# Altium PCB AD8318.PcbDoc
Units mil, origin at the board's own origin, x right, y up, seen from the top; angles counter-clockwise.
Board outline 2076 x 2487 mil, 2 copper layers (Top Layer, Bottom Layer); 32 components, 16 nets, 111 pads, 382 vias.
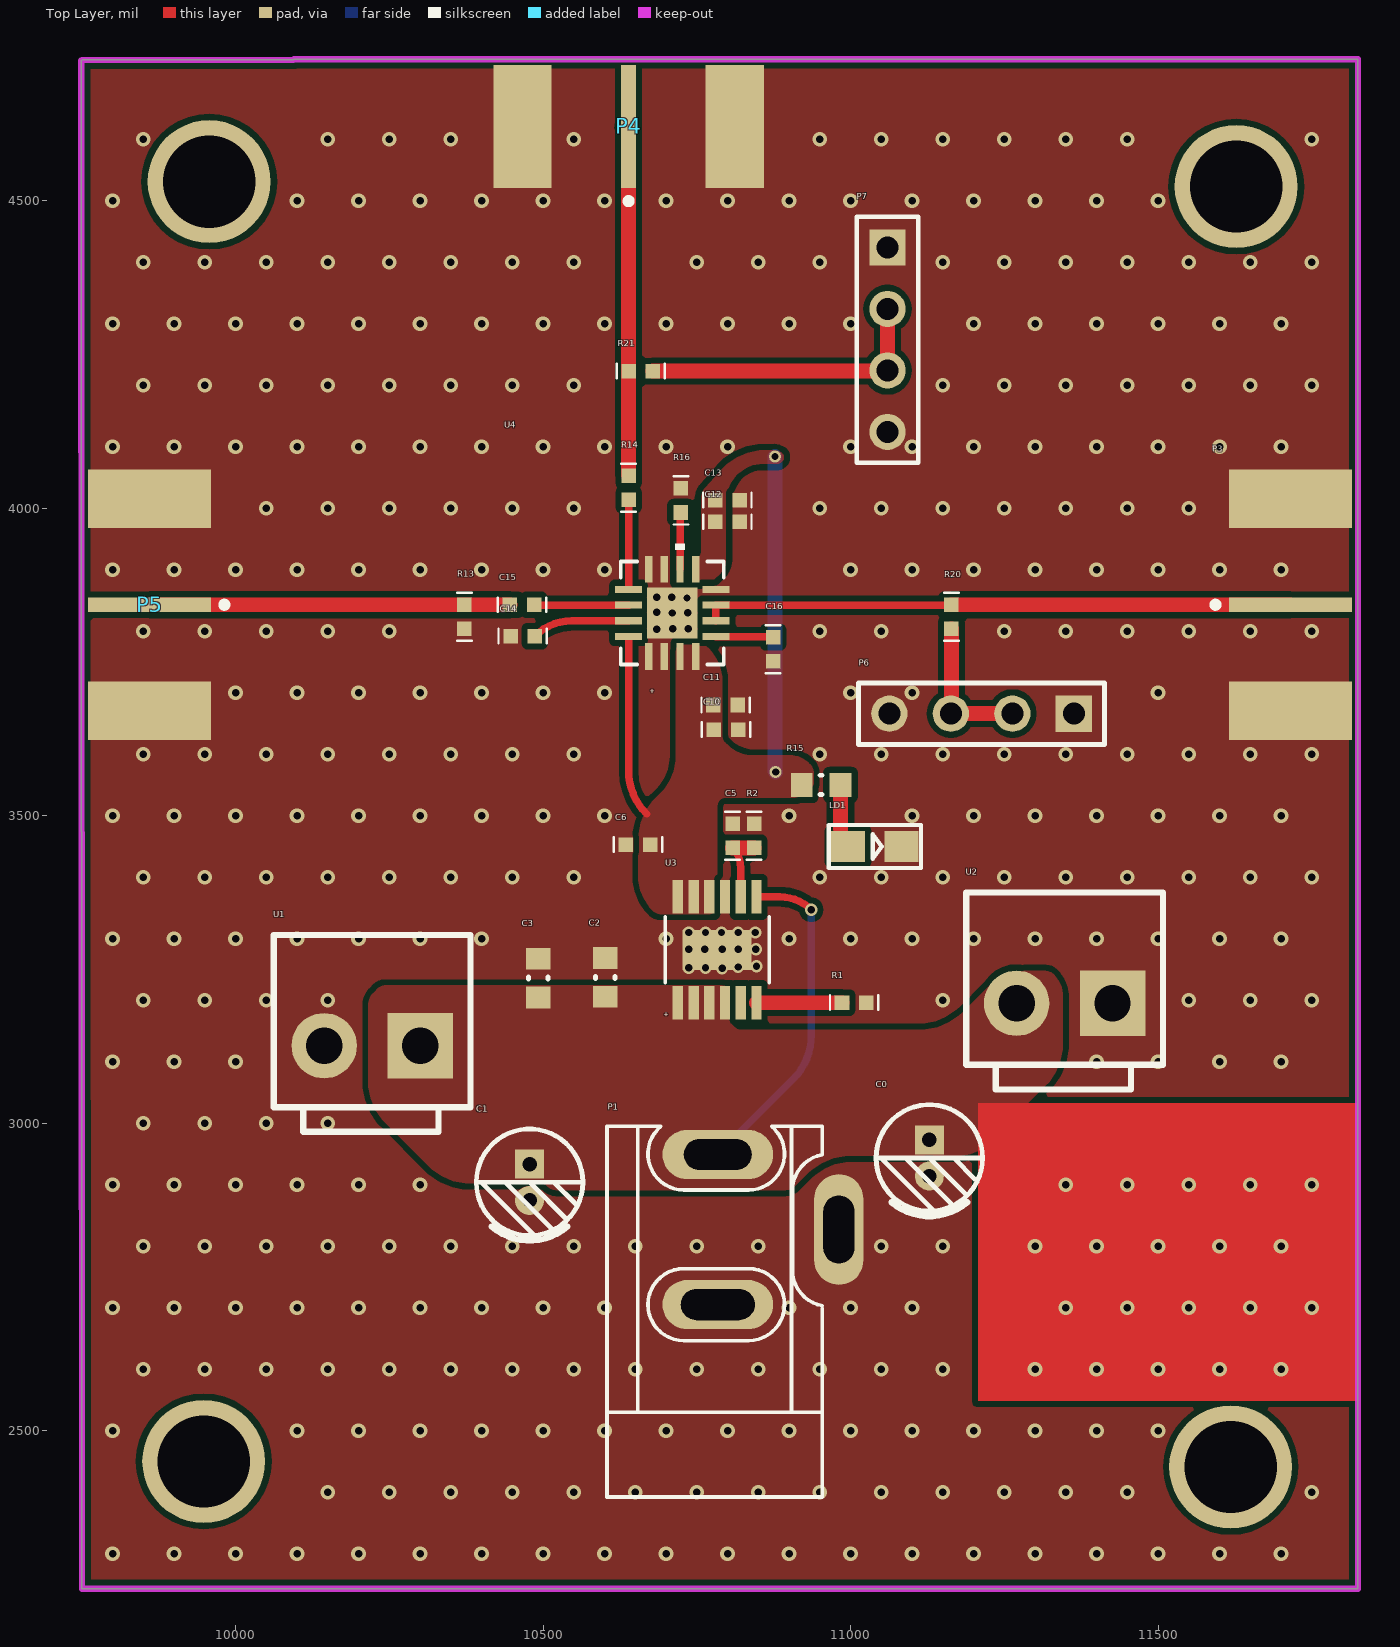
[diagram p0: Top Layer view]
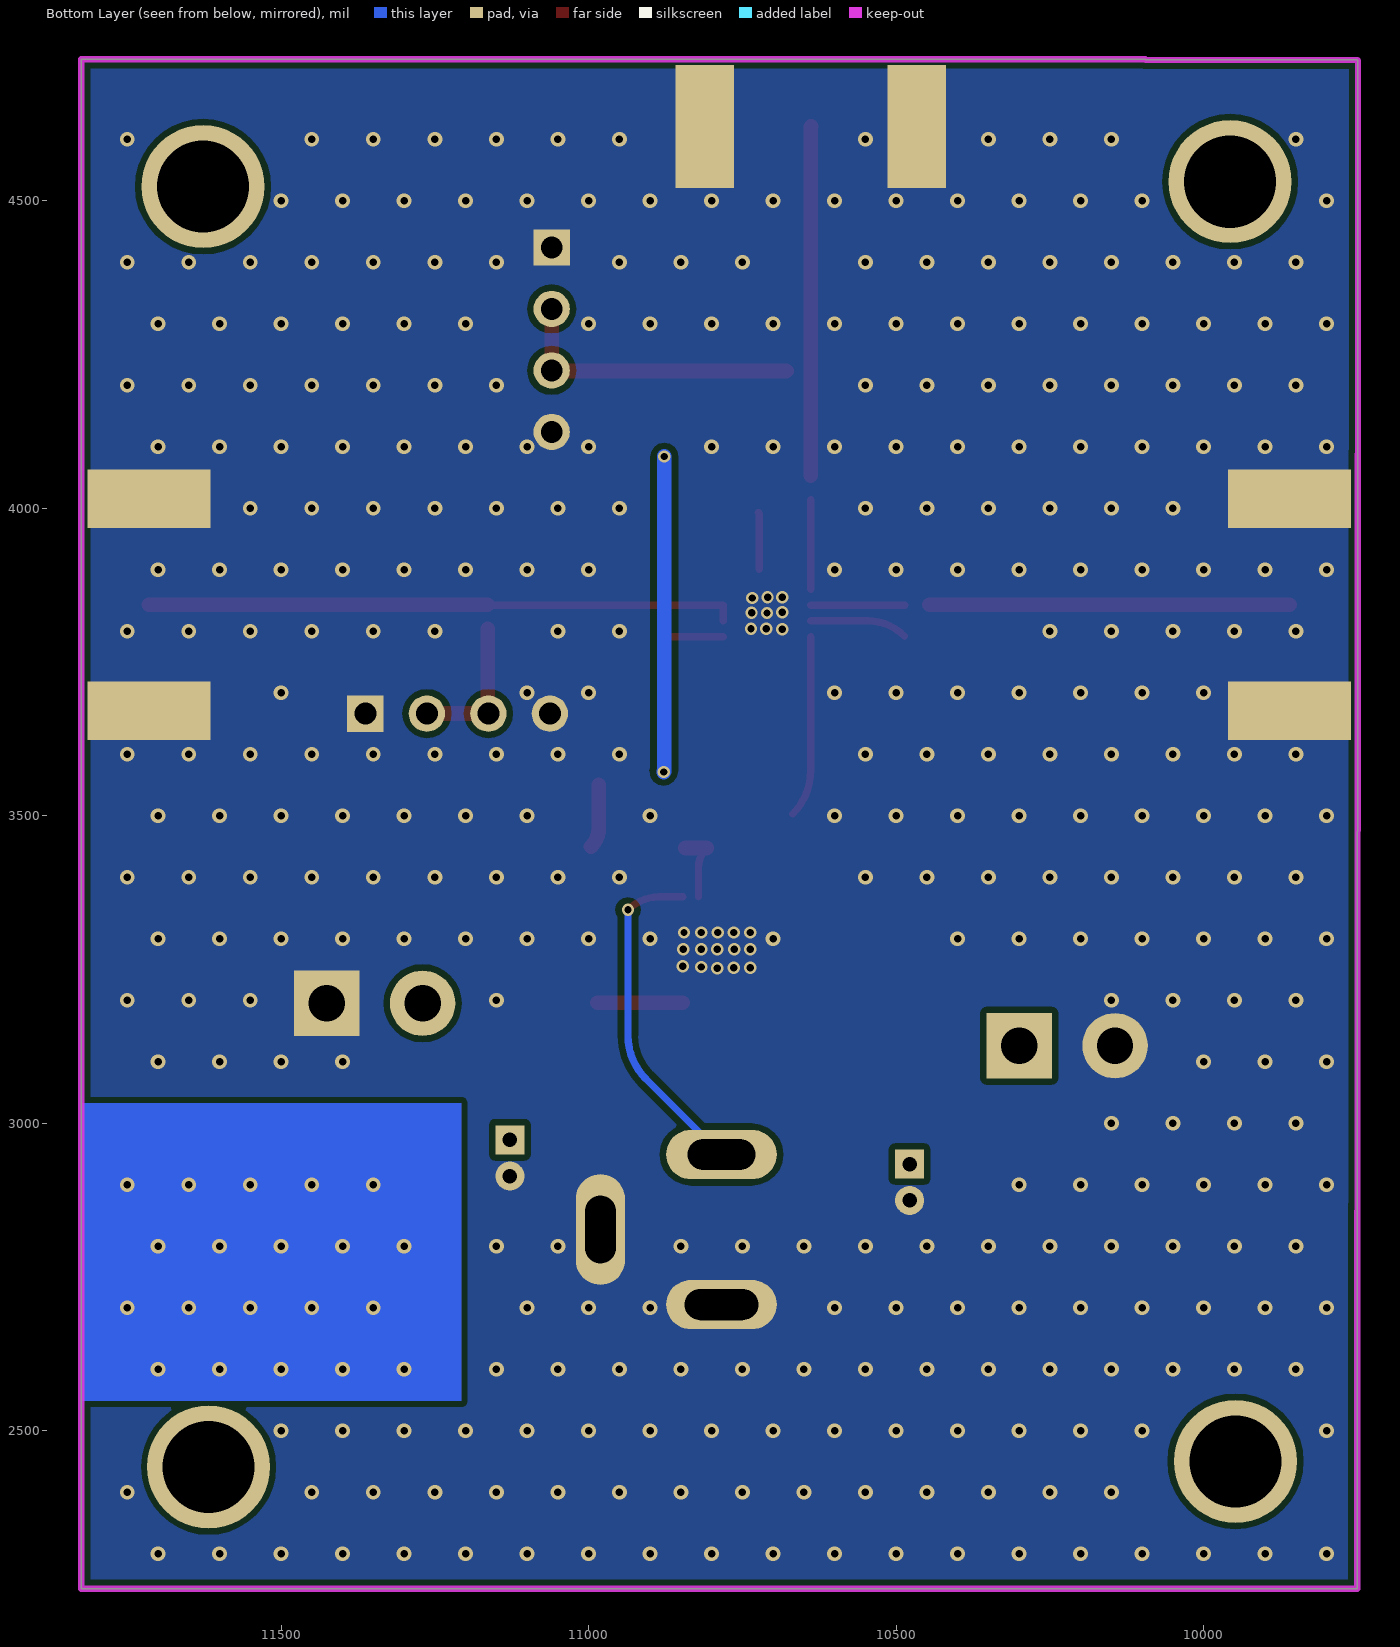
[diagram p1: Bottom Layer view, seen from below]

## Layer stack, top to bottom
Top Solder: solder mask 0.4, Solder Resist, Dk 3.5
Top Layer: signal copper 1.4
Dielectric 1: dielectric 12.6, FR-4, Dk 4.8
Bottom Layer: signal copper 1.4
Bottom Solder: solder mask 0.4, Solder Resist, Dk 3.5

## Board outline
9749,4706 9749,4728 9750,4729 10094,4729 10095,4730 11825,4730 11825,2243 9750.18,2243

## Design rules (kind name [scope] priority, off if disabled: settings)
Clearance [All] p1: gap=10 ignorepadtopadclearanceinfootprint=FALSE except(0: Arc-Hole Track-Hole SMDPad-Hole THPad-Hole Via-Hole Fill-Hole Poly-Hole Region-Hole Text-Hole)
PlaneConnect [All] p1: planeconnectstyle=Direct reliefexpansion=20 reliefentries=4 reliefconductorwidth=10 reliefairgap=10
PolygonConnect [All] p1: connectstyle=Direct reliefconductorwidth=10 reliefentries=4 polygonreliefangle="90 Angle" airgapwidth=10
RoutingVias [All] p1: holewidth=28 width=50 viastyle="Through Hole" minholewidth=28 minwidth=50 maxholewidth=28 maxwidth=50
SolderMaskExpansion [All] p1: expansion=4
Width [All] p1: maxlimit=24 minlimit=10 preferedwidth=24
29 further rules are at their usual default settings.

## Components (designator, comment, footprint, x,y, rotation, side; value= is the part's Value field where it differs from the comment)
C0 "0" "CAP 1.5*4*8" 11128,2943.47 r270 top
C1 "0" "CAP 1.5*4*8" 10478,2904 r270 top
C2 "0" 0603C 10601,3237 r90 top
C3 "4.7uf" 0603C 10492,3236 r90 top
C5 "0.47uF" 0402 10808,3447.63 r90 top
C6 "10uF" 0402 10634.63,3453 r0 top
C10 "100pF" 0402 10817,3640 r180 top
C11 "100nF" 0402 10816.37,3680 r180 top
C12 "100pF" 0402 10819.35,3978 r180 top
C13 "100nF" 0402 10819.35,4013 r180 top
C14 "100nF" 0402 10486.37,3792 r180 top
C15 "100nF" 0402 10446,3843 r0 top
C16 "10nF" 0402 10874,3790.24 r270 top
LD1 "LED" SMDLED 10995.97,3450.06 r0 top
P1 "DC005" DC10B 10954,2530 r90 top
P3 "SMA" SMA 11619,3848 r180 top
P4 "SMA" SMA 10634,4525 r270 top
P5 "SMA" SMA 9956,3838 r0 top
P6 "Header 4" HDR1X4 11363,3666 r180 top
P7 "Header 4" HDR1X4 11060,4424 r270 top
R1 "0.5K" 0402 11025.37,3196 r180 top
R2 "50K" 0402 10843,3487 r270 top
R13 "56" 0402 10372,3803.63 r90 top
R14 "1k" 0402 10639,4013.63 r90 top
R15 "1k" 0603R 10952,3550 r180 top
R16 "499" 0402 10724,3993 r90 top
R20 "0" 0402 11164,3803.63 r90 top
R21 "0" 0402 10678.37,4223 r180 top
U1 "3.96" 3.96 10222.05,3126 r180 top
U2 "3.96" 3.96 11348,3195 r180 top
U3 "LT3045EMSE" MSOP12-MSE-RevG_ADI 10783,3282 r90 top
U4 "AD8318SCPZ-EP-WP" CP_16_23_ADI 10709.96,3829.61 r90 top

## Footprints (in the part's own frame and the unit in brackets; to place one, negate y for a bottom-side part, rotate by r counter-clockwise, add the part's x,y. Pads: shape width x height; smd on the part's side, far side on the other; paste and mask are expansions set on the pad)
3.96 [mm] "接插件，25V/5A"
  rect 2.7x2.7 hole 1.5: 1(-1.98,0)
  round 2.7 hole 1.5: 2(1.982,0)
  silkscreen extent -4.06,-4.57 4.07,3.56, body extent -3.98,-4.4 4.03,4.16, height 10.5
0402 [mm]
  rect 0.6x0.6 smd: 1(0,0) 2(1,0)
  silkscreen extent -0.5,-0.3 1.5,0.3
0603C [mm] "Chip Capacitor, Body 1.6x0.8mm, Height 1.0mm, IPC Medium Density"
  rect 0.9x1 smd: 1(-0.8,0) 2(0.8,0)
  silkscreen extent -0.05,-0.4 0.05,0.4, body extent -0.87,-0.48 0.88,0.47, height 1
0603R [mm] "Chip Resistor, Body 1.6x0.8mm, IPC Medium Density"
  rect 0.9x1 smd: 1(-0.8,0) 2(0.8,0)
  silkscreen extent -0.05,-0.4 0.05,0.4, body extent -0.85,-0.47 0.85,0.47, height 0.6
"CAP 1.5*4*8" [mm] "脚距1.5mm直径4mm高度8mm"
  rect 1.2x1.2 hole 0.6: 1(-0.75,0)
  round 1.2 hole 0.6: 2(0.75,0)
  silkscreen extent -2.2,-2.2 2.41,2.2, body extent -2,-2 2.02,2, height 8.04
CP_16_23_ADI [mm]
  rect 1.105x0.299 smd paste+0 mask+0: 1(-1.802,0.975) 2(-1.802,0.325) 3(-1.802,-0.325) 4(-1.802,-0.975) 9(1.802,-0.975) 10(1.802,-0.325) 11(1.802,0.325) 12(1.802,0.975)
  rect 0.299x1.105 smd paste+0 mask+0: 5(-0.975,-1.802) 6(-0.325,-1.802) 7(0.325,-1.802) 8(0.975,-1.802) 13(0.975,1.802) 14(0.325,1.802) 15(-0.325,1.802) 16(-0.975,1.802)
  rect 2.1x2.1 smd paste+0 mask+0: 17(0,0)
  silkscreen extent -2.13,-2.13 2.86,2.13, body extent 0,0 0.25,0.25, height 0.25
DC10B [mil]
  oval 80x180 hole 50 slot 110 at 90 deg: 1(419.09,170)
  oval 80x180 hole 50 slot 120 at 90 deg: 2(175,170)
  oval 180x80 hole 50 slot 110 at 0 deg: 3(297.05,-26.85)
  silkscreen extent -138,0 465,350
HDR1X4 [mm]
  rect 1.5x1.5 hole 0.9: 1(0,0)
  round 1.5 hole 0.9: 2(2.54,0) 3(5.08,0) 4(7.62,0)
  silkscreen extent -1.27,-1.27 8.89,1.27
MSOP12-MSE-RevG_ADI [mm]
  rect 1.393x0.431 smd paste+0 mask+0: 1(-2.185,1.625) 2(-2.185,0.975) 3(-2.185,0.325) 4(-2.185,-0.325) 5(-2.185,-0.975) 6(-2.185,-1.625) 7(2.185,-1.625) 8(2.185,-0.975) 9(2.185,-0.325) 10(2.185,0.325) 11(2.185,0.975) 12(2.185,1.625)
  rect 1.651x2.845 smd paste-1.41 mask+0: EPAD(0,0)
  silkscreen extent -1.36,-2.15 1.36,2.15, body extent 0,0 0.25,0.25, height 0.25
SMA [mil]
  rect 200x24 smd: 1(-96,5)
  rect 200x95 smd: 2(-96,-167.5) 2(-96,177.5)
  rect 200x95 smd far side: 2(-96,-167.5) 2(-96,177.5) 2(-96,177.5)
  silkscreen extent 21,0 31,10, body extent -571,-183 -9,192, height 171
SMDLED [mm]
  rect 1.4x1.27 smd: 1(0.001,-0.002) 2(2.211,-0.002)
  silkscreen extent -0.8,-0.89 3.01,0.89

## Part data
C0 C1 C2 C3 C5 C6 C10 C11 C12 C13 C14 C15 C16: library part C, "Capacitor"
LD1: "Typical RED, GREEN, YELLOW, AMBER GaAs LED", PackageDocument=Feb-2002, LatestRevisionDate=17-Jul-2002, LatestRevisionNote="Re-released for DXP Platform.", PackageReference=3.2X1.6X1.1, Published=8-Jun-2000, Publisher="Altium Limited"
P3 P4 P5: "SMA Connector"
P6 P7: "Header, 4-Pin", LatestRevisionDate=17-Jul-2002, LatestRevisionNote="Re-released for DXP Platform.", Publisher="Altium Limited"
R1 R2 R13 R14 R15 R16 R20 R21: library part Resistor, "Resistor"
U3 U4: "No Description Available", Copyright="Copyright (C) 2018 Accelerated Designs. All rights reserved", RefDes=RefDes, Type=DEV, Vendor="Analog Devices Inc"
  U3: Built_By=SunStream, Manufacturer_Part_Number=LT3045EMSE, SourceLibrary=Analog_Devices_Inc_2020-09-15
  U4: Built_By="Analog Devices Imc.", Manufacturer_Part_Number=AD8318SCPZ-EP-WP, SourceLibrary=Analog_2018-01-18

## Free pads (board coordinates)
  round 200 hole 150: 3(9948.17,2450) 3(9957,4531) 3(11618,2441) 3(11627,4523)

## Via types
v1: diameter 24, hole 12, Top Layer to Bottom Layer, tented both sides, 355 vias
v2: diameter 20, hole 12, Top Layer to Bottom Layer, tented both sides, 27 vias

## Nets (pads, with @x,y where several pads share a name; then routed paths per layer and width w, separated by ;. In a path a pad name is that pad's centre, name@x,y a point inside that pad or via, vN(x,y) a via of type N, cw(c..) or ccw(c..) an arc to the next point about the centre after c; other vN are vias at no path point)
5V: C6.2 C10.2 C11.2 C12.2 C13.2 R15.2 U3.10 U3.11 U3.12 U4.3 U4.4 U4.9 U4.16 | length 809.6
  Top Layer w12: U4.16 10639,3573.42 ccw(c10739,3573.42) 10668.29,3502.71
  Bottom Layer w24: v2(10877,4084) 10877,3573.41 ccw(c10880.41,3573.41) v2(10878,3571)
GND: C0.2 C1.2 C2.2 C3.2 C5.2 C6.1 C10.1 C11.1 C12.1 C13.1 C14.2 C16.2 LD1.2 P1.2 P1.3 P3.2 P4.2 P5.2 P6.1 P6.4 P7.1 P7.4 R1.1 R2.1 R13.1 R16.2 U1.2 U2.1 U3.9 U3.EPAD U4.1 U4.2 U4.8 U4.11 U4.12 U4.17
  other v1: 9800,2300 9900,2300 10000,2300 10100,2300 10200,2300 10300,2300 10400,2300 10500,2300 10600,2300 10700,2300 10800,2300 10900,2300 11000,2300 11100,2300 11200,2300 11300,2300 11400,2300 11500,2300 11600,2300 11700,2300 10150,2400 10250,2400 10350,2400 10450,2400 10550,2400 10650,2400 10750,2400 10850,2400 10950,2400 11050,2400 11150,2400 11250,2400 11350,2400 11450,2400 11750,2400 9800,2500 10100,2500 10200,2500 10300,2500 10400,2500 10500,2500 10600,2500 10700,2500 10800,2500 10900,2500 11000,2500 11100,2500 11200,2500 11300,2500 11400,2500 11500,2500 9850,2600 9950,2600 10050,2600 10150,2600 10250,2600 10350,2600 10450,2600 10550,2600 10650,2600 10750,2600 10850,2600 10950,2600 11050,2600 11150,2600 9800,2700 9900,2700 10000,2700 10100,2700 10200,2700 10300,2700 10400,2700 10500,2700 10600,2700 10900,2700 11000,2700 11100,2700 9850,2800 9950,2800 10050,2800 10150,2800 10250,2800 10350,2800 10450,2800 10550,2800 10650,2800 10750,2800 10850,2800 11050,2800 11150,2800 9800,2900 9900,2900 10000,2900 10100,2900 10200,2900 10300,2900 9850,3000 9950,3000 10050,3000 10150,3000 9800,3100 9900,3100 10000,3100 11400,3100 11500,3100 11600,3100 11700,3100 9850,3200 9950,3200 10050,3200 10150,3200 11150,3200 11550,3200 11650,3200 11750,3200 9800,3300 9900,3300 10000,3300 10100,3300 10200,3300 10300,3300 10400,3300 10700,3300 10900,3300 11000,3300 11100,3300 11200,3300 11300,3300 11400,3300 11500,3300 11600,3300 11700,3300 9850,3400 9950,3400 10050,3400 10150,3400 10250,3400 10350,3400 10450,3400 10550,3400 10950,3400 11050,3400 11150,3400 11250,3400 11350,3400 11450,3400 11550,3400 11650,3400 11750,3400 9800,3500 9900,3500 10000,3500 10100,3500 10200,3500 10300,3500 10400,3500 10500,3500 10600,3500 10900,3500 11100,3500 11200,3500 11300,3500 11400,3500 11500,3500 11600,3500 11700,3500 9850,3600 9950,3600 10050,3600 10150,3600 10250,3600 10350,3600 10450,3600 10550,3600 10950,3600 11050,3600 11150,3600 11250,3600 11350,3600 11450,3600 11550,3600 11650,3600 11750,3600 10000,3700 10100,3700 10200,3700 10300,3700 10400,3700 10500,3700 10600,3700 11000,3700 11100,3700 11500,3700 9850,3800 9950,3800 10050,3800 10150,3800 10250,3800 10950,3800 11050,3800 11250,3800 11350,3800 11450,3800 11550,3800 11650,3800 11750,3800 9800,3900 9900,3900 10000,3900 10100,3900 10200,3900 10300,3900 10400,3900 10500,3900 10600,3900 11000,3900 11100,3900 11200,3900 11300,3900 11400,3900 11500,3900 11600,3900 11700,3900 10050,4000 10150,4000 10250,4000 10350,4000 10450,4000 10550,4000 10950,4000 11050,4000 11150,4000 11250,4000 11350,4000 11450,4000 11550,4000 9800,4100 9900,4100 10000,4100 10100,4100 10200,4100 10300,4100 10400,4100 10500,4100 10600,4100 10700,4100 10800,4100 11000,4100 11100,4100 11200,4100 11300,4100 11400,4100 11500,4100 11600,4100 11700,4100 9850,4200 9950,4200 10050,4200 10150,4200 10250,4200 10350,4200 10450,4200 10550,4200 11150,4200 11250,4200 11350,4200 11450,4200 11550,4200 11650,4200 11750,4200 9800,4300 9900,4300 10000,4300 10100,4300 10200,4300 10300,4300 10400,4300 10500,4300 10600,4300 10700,4300 10800,4300 10900,4300 11000,4300 11200,4300 11300,4300 11400,4300 11500,4300 11600,4300 11700,4300 9850,4400 9950,4400 10050,4400 10150,4400 10250,4400 10350,4400 10450,4400 10550,4400 10750,4400 10850,4400 10950,4400 11150,4400 11250,4400 11350,4400 11450,4400 11550,4400 11650,4400 11750,4400 9800,4500 10100,4500 10200,4500 10300,4500 10400,4500 10500,4500 10600,4500 10700,4500 10800,4500 10900,4500 11000,4500 11100,4500 11200,4500 11300,4500 11400,4500 11500,4500 9850,4600 10150,4600 10250,4600 10350,4600 10550,4600 10950,4600 11050,4600 11150,4600 11250,4600 11350,4600 11450,4600 11750,4600
  other v2: 10791,3252 10737,3253 10764,3253 10817,3254 10847,3255 10737,3283 10763,3283 10791,3283 10817,3283 10846,3283 10737,3310 10764,3310 10790,3310 10817,3310 10845,3310 10685,3803 10711,3804 10736,3804 10709.96,3829.61 10735,3830 10685,3831 10734,3854 10685,3855 10709,3855
NetC5_1: C5.1 R2.2 U3.8 | length 118.2
  Top Layer w12: C5.1 cw(c10775.68,3415.31) 10821.39,3415.31 U3.8
  Top Layer w24: C5.1 R2.2
NetC14_1: C14.1 U4.15 | length 159.3
  Top Layer w12: C14.1 cw(c10546.29,3732.08) 10546.29,3816.82 U4.15
NetC15_1: C15.1 P5.1 R13.2 | length 586
  Top Layer w24: P5.1 R13.2 C15.1
NetC15_2: C15.2 U4.14 | length 153
  Top Layer w12: C15.2@10485.96,3842.41 U4.14
NetC16_1: C16.1 U4.5 | length 93.3
  Top Layer w12: U4.5 10871.62,3791.23 cw(c10871.62,3787.87) C16.1
NetLD1_1: LD1.1 R15.1 | length 103.3
  Top Layer w24: R15.1 10983.5,3480.19 ccw(c11026.19,3480.19) LD1.1
NetP3_1: P3.1 R20.2 U4.6 U4.7 | length 959.8
  Top Layer w12: U4.6 U4.7 11162.57,3842.41 ccw(c11162.57,3844.43) R20.2
  Top Layer w24: R20.2 P3.1
NetP6_2: P6.2 P6.3 R20.1 | length 237.9
  Top Layer w24: R20.1 11164,3668.41 cw(c11160.59,3668.41) P6.3 P6.2
NetP7_2: P7.2 P7.3 R21.1 | length 481.9
  Top Layer w24: R21.1 11057.59,4223 ccw(c11057.59,4226.41) P7.3 P7.2
NetR1_2: R1.2 U3.6 | length 139
  Top Layer w24: U3.6 R1.2
NetR14_1: R14.1 U4.13 | length 145.6
  Top Layer w12: U4.13 R14.1
NetR16_1: R16.1 U4.10 | length 92.8
  Top Layer w12: U4.10 10722.76,3990 cw(c10727,3990) R16.1
TEMP: P4.1 R14.2 R21.2 | length 568.3
  Top Layer w24: P4.1@10638,4621 cw(c10635.59,4618.59) 10639,4618.59 R21.2 R14.2
VCC: C0.1 C1.1 C2.1 C3.1 P1.1 U1.1 U2.2 U3.1 U3.2 U3.3 U3.4 U3.7 | length 551.2
  Top Layer w12: U3.7 10885.24,3368.02 cw(c10885.24,3296.24) v2(10936,3347)
  Bottom Layer w12: P1.1 10906.71,3071.8 ccw(c10836,3142.52) 10936,3142.52 v2(10936,3347)
  other v1: 11300,2600 11400,2600 11500,2600 11600,2600 11700,2600 11350,2700 11450,2700 11550,2700 11650,2700 11750,2700 11300,2800 11400,2800 11500,2800 11600,2800 11700,2800 11350,2900 11450,2900 11550,2900 11650,2900 11750,2900
pads on no net: U3.5

## Polygon pours and split planes (outlines as drawn)
VCC on Top Layer "Top Layer-No Net" (solid, pour order 0): 10789.51,3224 cw(c10789.51,3203.51) 10804,3218 cw(c10801.59,3215.59) 10805,3215.59 10805,3169 ccw(c10819.49,3169) 10809.24,3158.76 10812,3156 ccw(c10821.66,3165.66) 10821.66,3152 11112.58,3152 ccw(c11112.58,3252) 11183.29,3181.29 11220.71,3218.71 cw(c11291.42,3148) 11291.42,3248 11315.51,3248 cw(c11315.51,3227.51) 11330,3242 cw(c11293.79,3205.79) 11345,3205.79 11345,3130.42 cw(c11245,3130.42) 11315.71,3059.71 11223,2967 cw(c11174.72,3015.28) 11174.72,2947 11000.42,2947 ccw(c11000.42,2847) 10929.71,2917.71 10911,2899 cw(c10891.69,2918.31) 10891.69,2891 10522.9,2891 cw(c10522.9,2914.9) 10506,2898 ccw(c10496.34,2888.34) 10496.34,2902 10383.42,2902 cw(c10383.42,3002) 10312.71,2931.29 10245.29,2998.71 cw(c10316,3069.42) 10216,3069.42 10216,3192 cw(c10244.97,3192) 10224.49,3212.49 10231,3219 cw(c10243.07,3206.93) 10243.07,3224
5V on Top Layer "Top Layer-No Net" (solid, pour order 2): 10723,3780 10720.24,3777.24 ccw(c10730.49,3767) 10716,3767 10716,3597.36 cw(c10630.64,3597.36) 10691,3537 10684.29,3530.29 ccw(c10755,3459.58) 10655,3459.58 10655,3402.94 ccw(c10736.94,3402.94) 10679,3345 ccw(c10691.07,3357.07) 10691.07,3340 10771,3340 ccw(c10771,3347.24) 10776.12,3342.12 10779,3345 ccw(c10769.34,3354.66) 10783,3354.66 10783,3513.93 cw(c10800.07,3513.93) 10788,3526 cw(c10795.24,3518.76) 10795.24,3529 10906.44,3529 ccw(c10906.44,3566.56) 10933,3540 10934.34,3541.34 ccw(c10920.69,3555) 10940,3555 10940,3568.1 ccw(c10916.1,3568.1) 10933,3585 ccw(c10901.62,3553.62) 10901.62,3598 10840,3598 cw(c10840,3653.53) 10800.74,3614.26 10796,3619 cw(c10808.07,3631.07) 10791,3631.07 10791,3718.89 ccw(c10715.89,3718.89) 10769,3772 ccw(c10744.86,3747.86) 10744.86,3782 10728,3782
5V on Top Layer "Top Layer-No Net" (solid, pour order 4): 10764,4033 ccw(c10780.9,4016.1) 10757,4016.1 10757,3929 cw(c10747.34,3929) 10754.17,3922.17 10745.12,3913.12 ccw(c10750.24,3908) 10743,3908 10743,3883.83 ccw(c10749.83,3883.83) 10745,3879 10773,3879 10787.81,3893.81 ccw(c10765.62,3916) 10797,3916 10797,4009.13 cw(c10861.87,4009.13) 10816,4055 cw(c10857.04,4013.96) 10857.04,4072 10881,4072 ccw(c10881,4079.24) 10886.12,4074.12 10891,4079 10891,4085.59 ccw(c10887.59,4085.59) 10890,4088 ccw(c10875.51,4073.51) 10875.51,4094 10860.6,4094 ccw(c10860.6,3998.4) 10793,4066
GND on Top Layer "Top Layer-No Net" (solid, pour order 6): 9749,4728 cw(c9753.83,4723.17) 9753.83,4730 11825,4730 11825,2243 9750.18,2243
GND on Bottom Layer "Top Layer-No Net" (solid, pour order 8): 9749,4728 cw(c9753.83,4723.17) 9753.83,4730 11825,4730 11825,2243 9750.18,2243

## Keep-outs
Keep-Out Layer:
  lines w10: 9749,4706 9750.18,2243 11825,2243 11825,4730 10095,4730 10094,4729 9765,4729 9750,4729 9749,4728 9749,4706

## Other copper
Top Layer:
  rectangle net VCC: 11207,2548 11823,3033
Bottom Layer:
  rectangle net VCC: 11207,2548 11823,3033

## Silkscreen, mask and mechanical layers (free items; w line width, h text height)
Top Solder:
  rectangle: 11208,2549 11824,3034
  rectangle: 9764,2607 10248,2989
Bottom Solder:
  rectangle: 11207,2548 11823,3033
  rectangle: 9762,2594 10246,2976
  rectangle: 10618,3121 10900,3411
  rectangle: 10592,3723 10831,3932

## Text inside footprints (layer, text, board x,y; h text height)
U3: Top Overlay "*" at 10707.06,3173.48 h10 r90
U4: Top Overlay "*" at 10683.78,3699.41 h10 r90; Mechanical 13 "*" at 10683.78,3767.9 h10 r90